# Altium PCB MCU099_MSPM0L1306_PCB.PcbDoc (part 5 of 5)
Units mil, origin at the board's own origin, x right, y up, seen from the top; angles counter-clockwise.
Board outline 2310.03 x 3906.03 mil, 4 copper layers (Top Layer, VCC Layer, GND Layer, Bottom Layer), stack 62.4 mil thick; 211 components, 124 nets, 674 pads, 192 vias.
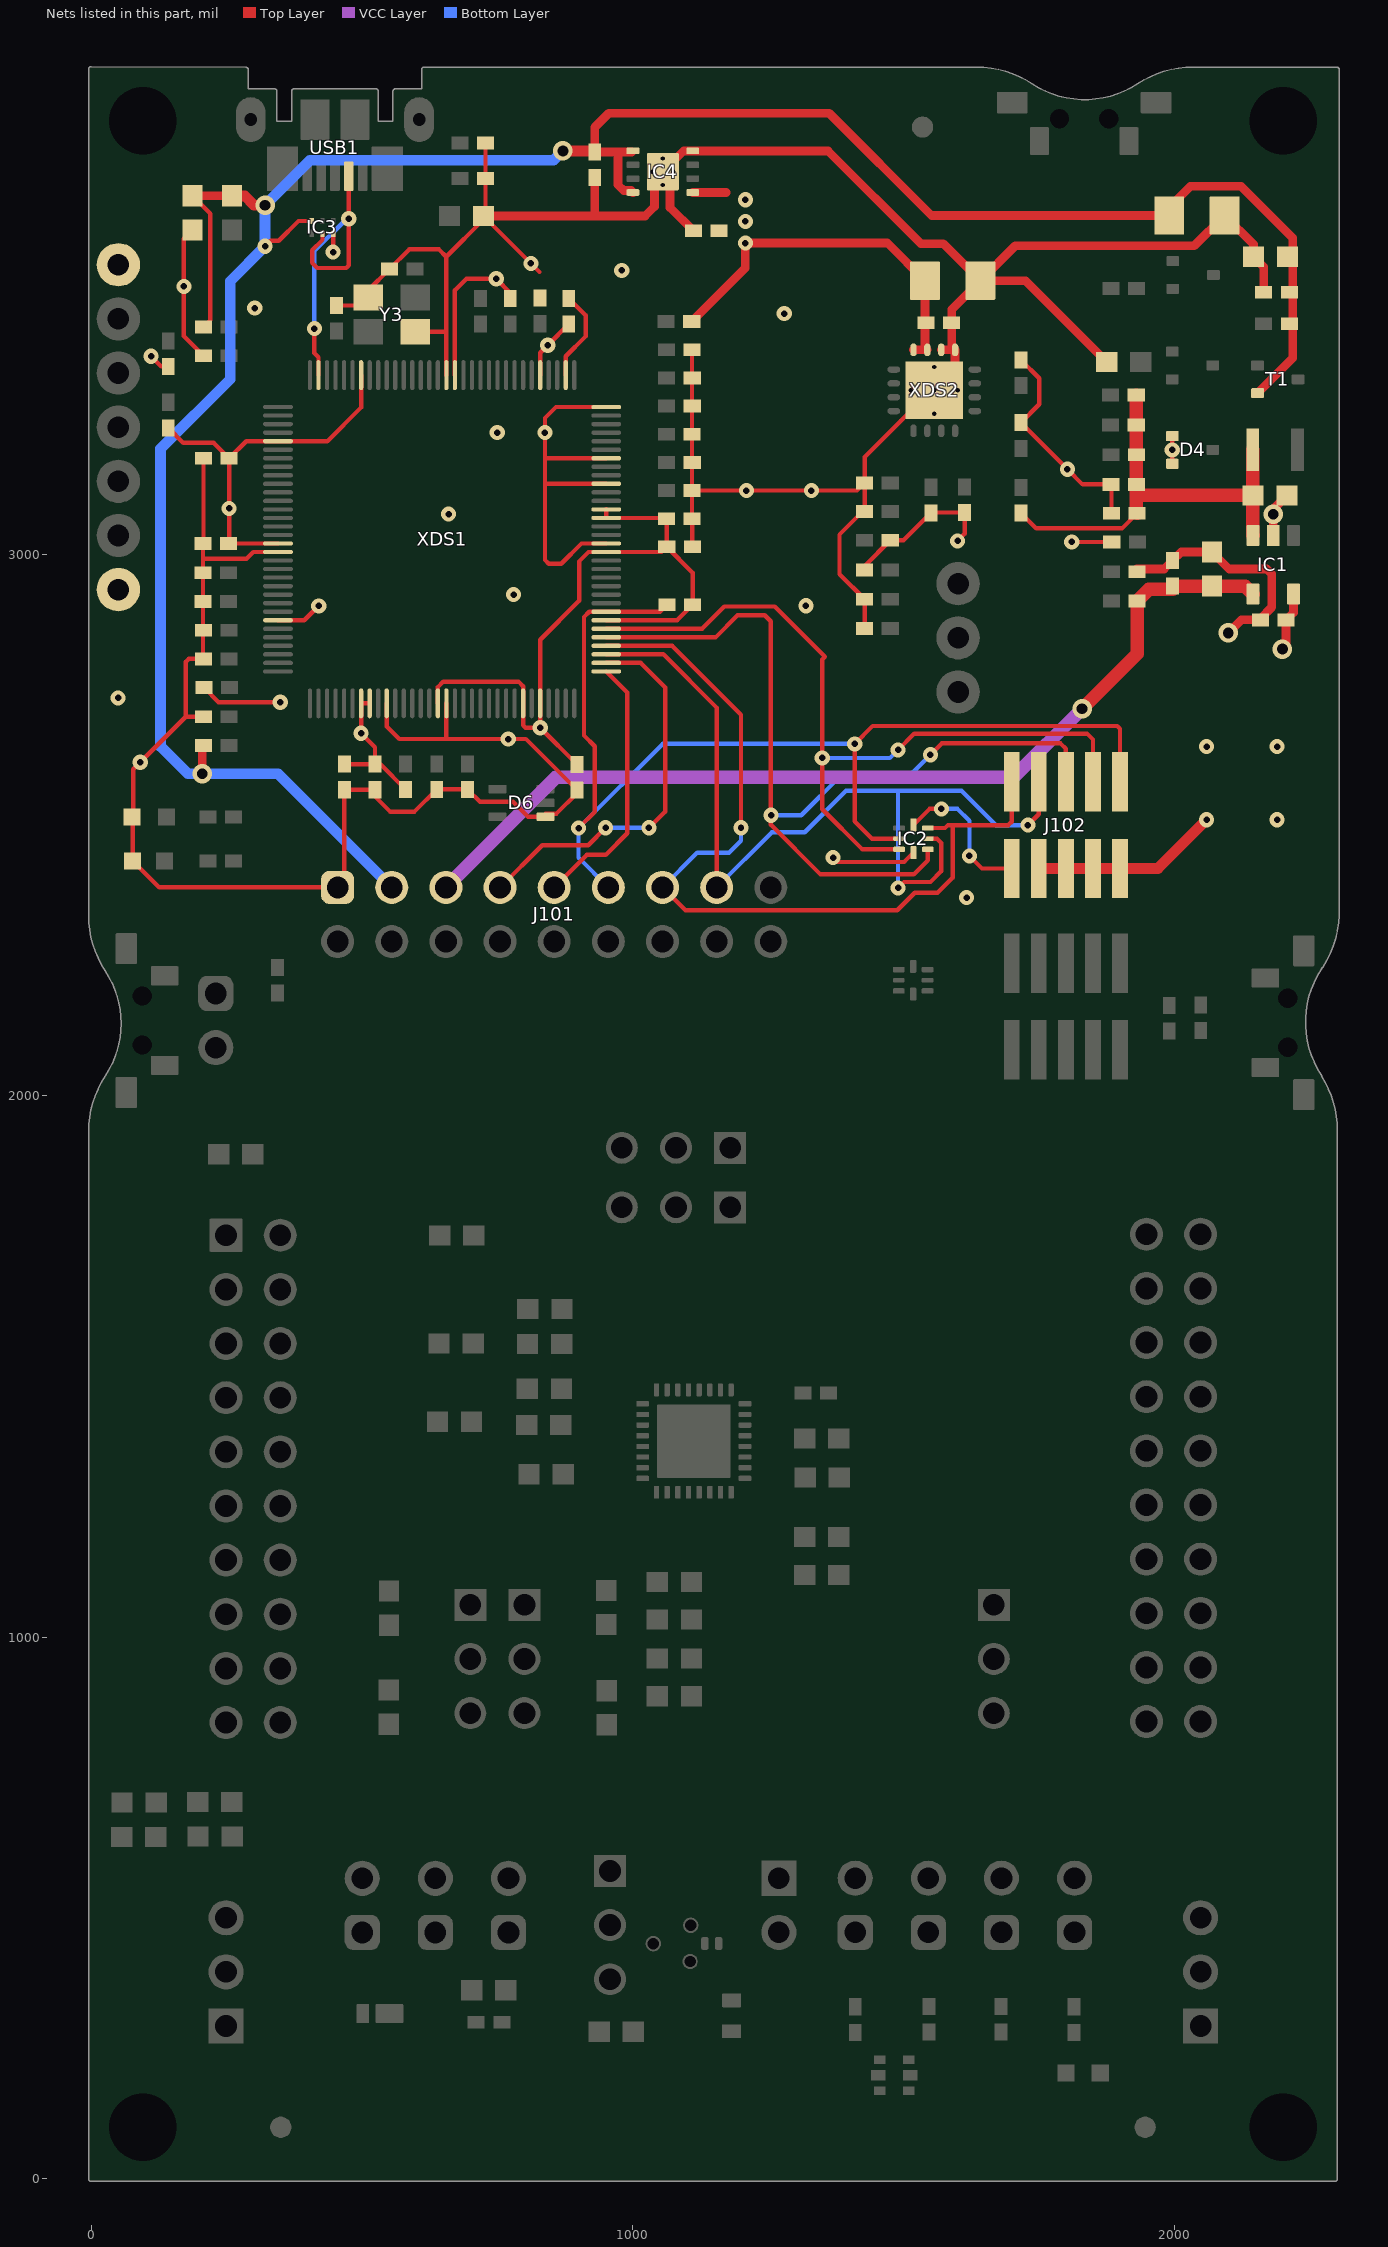
[diagram p5: the nets of this part, all layers, seen from the top]

## Via types
v1: diameter 28, hole 12, Top Layer to Bottom Layer, tented both sides, 89 vias
v2: diameter 28, hole 12, Top Layer to Bottom Layer, 77 vias
v3: diameter 19.68, hole 7.87, Top Layer to Bottom Layer, tented both sides, 12 vias
v4: diameter 36, hole 20, Top Layer to Bottom Layer, tented both sides, 7 vias
v5: diameter 19.68, hole 7.87, Top Layer to Bottom Layer, 5 vias
v6: diameter 40, hole 18, Top Layer to Bottom Layer, 1 vias
v7: diameter 28/28/28/28 (per signal layer), hole 12, Top Layer to Bottom Layer, tented top, 1 vias

## Nets (pads, with @x,y where several pads share a name; then routed paths per layer and width w, separated by ;. In a path a pad name is that pad's centre, name@x,y a point inside that pad or via, vN(x,y) a via of type N, cw(c..) or ccw(c..) an arc to the next point about the centre after c; other vN are vias at no path point) (continued)
XDS_GND: C13.2 C14.2 C15.2 C16.2 C17.2 C18.2 C19.2 C20.2 C21.2 C22.2 C23.2 C24.2 C25.2 C26.2 C27.2 C28.2 C29.2 C30.2 C31.2 C32.2 C33.2 C34.2 C35.2 C36.1 C37.2 C38.2 C39.2 C40.2 C41.2 C42.1 C43.2 C52.2 C53.2 C54.2 C55.2 C56.2 D4.1 D4.2 D6.1 IC1.2 IC2.4 IC3.3 IC4.4 IC4.9 J101.1 J102.3 J102.5 J102.7 J102.9 LED101.2 LED102.2 R24.2 R25.2 R26.2 R27.2 R33.1 R38.1 R45.1 R47.1 R50.1 R53.1 R54.1 R55.1 R85.2 R87.1 R89.1 TP10.1 XDS1.10 XDS1.17 XDS1.48 XDS1.55 XDS1.58 XDS1.64 XDS1.66 XDS1.80 XDS1.114 XDS2.13 XDS2.14 XDS2.17 Y3.2 Y3.4 | length 10059.2
  Top Layer w8: C52.2@187,3599.23 171,3583.23 v1(171,3495) 171,3403.38 C13.2@207.38,3367 ; R87.1@207.38,2700 174.5,2700 ; C18.2@207.38,3177.61 207.38,3021 C19.2@206.38,3020 206.38,2992 ; XDS1.114@344.85,3004.38 299.08,3004.38 286.7,2992 206.38,2992 ; v1(446.68,3558.31) IC3.3@446.68,3592.19 ; C29.2@452.72,3459.62 496.82,3459.62 Y3.4@511.69,3474.5 511.69,3487.9 C28.2@550.75,3526.97 587.18,3563.39 642.22,3563.39 655.75,3549.87 ; XDS1.10@545.64,2724.85 545.64,2682.16 568.8,2659 657,2659 ; Y3.2@598.31,3411.5 655.38,3411.5 655.75,3411.87 655.75,3549.87 ; XDS1.17@655.87,2724.85 655.87,2660.13 657,2659 ; XDS1.80@655.87,3331.15 655.87,3411.5 ; C53.2@728,3760 728,3628.5 R85.2@724.5,3625 ; 828,3521.5 v1(812,3537.5) R85.2@724.5,3625 ; XDS1.66@876.35,3331.15 876.35,3366.02 913,3402.68 913,3441.62 C14.2@882,3472.62 ; XDS1.48@951.15,3020.13 905.45,3020.13 868.12,2982.79 844.96,2982.79 838,2989.75 838,3131 ; XDS1.55@951.15,3130.36 838.64,3130.36 838,3131 ; XDS1.58@951.15,3177.61 838.61,3177.61 838,3177 ; XDS1.64@951.15,3272.22 858.22,3272.22 838,3252 v1(838,3225) 838,3177 ; C27.2@1109.62,3378 R26.2@1109.62,3222 R33.1@1109.62,3118 ; C15.2@1110.13,3014 1110.13,3065.5 C16.2@1109.62,3066 R33.1@1109.62,3118 ; v2(1370,2440) 1378,2432 1501.27,2432 IC2.4@1518.56,2449.29 ; R47.1@1428.38,2863 C34.2@1428.38,2917 1382,2963.38 1382,3036.5 1424.5,3079 R45.1@1428.38,3079 C33.2@1428.38,3132 ; v3(1557,3303) 1551.41,3303 1505.88,3257.47 1505.88,3257.25 1495.47,3246.83 1495.24,3246.83 1428.38,3179.97 C33.2@1428.38,3132 ; C30.2@1717,3359.24 1751,3325.24 1751,3277.24 R38.1@1717,3243.24 v1(1803,3157.24) 1830.89,3129.35 C41.2@1883.38,3129.35 1884.38,3128.35 C43.2@1884.38,3076 ; v1(1810.75,3023) R50.1@1884.76,3023 ; D4.2@1996.6,3167.41 v1(1996.6,3193) D4.1@1996.6,3218.59 ; 174.5,2700 v1(90.5,2616) 77.59,2603.09 77.59,2515.41 76.47,2514.29 LED102.2@76.47,2434 125.47,2385 J101.1@455,2385 467.5,2397.5 C17.2@467.5,2565.38 C20.2@524,2565.38 524,2553 552,2525 596.99,2525 C25.2@638,2566.01 C26.2@695,2566.01 718.01,2543 779,2543 806.59,2515.41 D6.1@838.79,2515.41 838.79,2521.25 859.29,2521.25 897,2558.96 C21.2@897,2564.76 802.76,2659 v1(770,2659) 657,2659 ; 174.5,2700 174.5,2801.5 180,2807 R55.1@207.38,2807 206.38,2808 C23.2@206.38,2913 C22.2@206.38,2966 206.38,2992 ; 655.75,3549.87 724.5,3618.62 R85.2@724.5,3625 ; 838,3131 838,3177 ; R33.1@1109.62,3118 v1(1210,3118) v1(1330,3118) 1414.38,3118 C33.2@1428.38,3132
  Top Layer w16: R85.2@724.5,3625 930,3625 ; C54.2@930,3695.95 930,3625 ; C55.2@1112.1,3597.58 1069,3640.68 1069,3693.39 IC4.9@1055.61,3706.78 ; v3(1557,3303) 1595.39,3341.39 XDS2.13@1595.39,3377.8 1586,3377.8 ; XDS2.14@1569.79,3377.8 1586,3377.8 ; R53.1@1875.5,3355.41 1725.34,3505.58 C31.2@1642.2,3505.58 ; R54.1@1931.24,2968 1931.24,2973 1981.38,2973 C38.2@1997,2988.62 2012.87,3004.5 C39.2@2070,3004.5 2101.5,2973 2171,2973 2180,2964 2180,2902.39 2159.38,2881.76 C40.2@2159.38,2879 2124,2879 v4(2100,2855) ; C37.2@2165.38,3484 2165.38,3530.99 C36.1@2146.5,3549.87 2146.5,3572.68 C35.2@2093.18,3626 2037.1,3569.92 1706.54,3569.92 C31.2@1642.2,3505.58 ; IC1.2@2183,3035 v4(2183,3074) 2183,3083.5 C42.1@2208.5,3109 ; 930,3625 1022.77,3625 1040.25,3642.49 1040.25,3691.43 IC4.9@1055.61,3706.78 ; IC4.9@1055.61,3706.78 1093.99,3745.17 IC4.4@1110.72,3745.17 1360.63,3745.17 1531.8,3574 1573.77,3574 C31.2@1642.2,3505.58 ; 1586,3377.8 1589,3380.8 C32.2@1589,3428 1589,3452.38 C31.2@1642.2,3505.58
  Top Layer w20: J102.3@1750,2419.88 J102.5@1800,2419.88 J102.7@1850,2419.88 J102.9@1900,2419.88 1969.88,2419.88 v2(2060,2510)
  other v1: 1616.48,2366.17 2060,2645 2190,2645 49.5,2735 1320,2905.04 660,3074.32 749.88,3224.85 1280,3444.87 301.94,3454.84 979.85,3524.59
  other v2: 2190,2510
  other v3: 1557,3259.69 1513.69,3303 1600.31,3303 1557,3346.31 1055.61,3682.17 1035.92,3706.78 1075.29,3706.78 1055.61,3731.39
  other v7: 780.01,2925.64
XDS_ID: IC3.2 USB1.4 XDS1.95 | length 620.4
  Top Layer w8: v1(412,3417.02) 412,3371.85 419.65,3364.2 XDS1.95@419.65,3331.15 ; IC3.2@427,3592.19 427,3580.9 408.04,3561.94 408.04,3538.4 417.44,3529 470.93,3529 475.68,3533.75 v1(475.68,3620) USB1.4@475.68,3698.28
  Bottom Layer w8: v1(412,3417.02) 412,3560.22 471.78,3620 v1(475.68,3620)
XDS_RESET_OUT: IC2.2 J101.11 J102.10 R84.1 XDS1.40 | length 2122
  Top Layer w8: v1(900,2494.5) 930,2524.5 930,2645.5 910,2665.5 910,2884.5 919.65,2894.14 XDS1.40@951.15,2894.14 1050.52,2894.14 R84.1@1063.38,2907 ; IC2.2@1491.99,2474.88 1442.09,2474.88 1410.09,2506.87 v1(1410.09,2650) 1443.09,2683 1895,2683 1900,2678 J102.10@1900,2580.12
  Bottom Layer w8: J101.11@955,2385 900,2440 v1(900,2494.5) 1055.5,2650 v1(1410.09,2650)
XDS_RXD: J101.9 XDS1.33 | length 491.4
  Top Layer w8: J101.9@855,2385 915,2445 950.09,2445 990,2484.91 990,2744.99 951.21,2783.78 XDS1.33@951.15,2783.78
XDS_TCK_SWDCLK: IC2.6 J101.15 J102.4 XDS1.35 | length 1692.1
  Top Layer w8: XDS1.35@951.15,2815.4 1056.6,2815.4 1155,2717 J101.15@1155,2385 ; v1(1490,2384) 1500.93,2394.93 1549.85,2394.93 1570,2415.08 1570,2467 1562.12,2474.88 IC2.6@1545.14,2474.88 ; v2(1730,2500) 1750,2520 J102.4@1750,2580.12
  Bottom Layer w8: J101.15@1155,2385 1257,2487 1317.62,2487 1394,2563.38 1607.13,2563.38 1670.5,2500 v2(1730,2500) ; v1(1490,2384) 1490,2563
XDS_TDI: IC2.3 J102.8 XDS1.38 | length 1516.7
  Top Layer w8: XDS1.38@951.15,2862.65 1128.16,2862.65 1169.2,2903.68 1262.15,2903.68 1355,2810.83 1350,2805.83 v1(1350,2624) 1350,2529.38 1424.18,2455.19 IC2.3@1491.99,2455.19 ; v2(1490,2639) 1520,2669 1839.09,2669 1850,2658.1 J102.8@1850,2580.12
  Bottom Layer w8: v1(1350,2624) 1475,2624 v2(1490,2639)
XDS_TDO_SWO: IC2.5 J102.6 XDS1.37 | length 1724.4
  Top Layer w8: XDS1.37@951.15,2846.9 1038.1,2846.9 ; 1038.1,2846.77 1152.8,2846.77 1193.68,2887.65 1243.88,2887.65 1255,2876.53 1255,2500.97 1346.97,2409 1519,2409 1545.14,2435.14 IC2.5@1545.14,2455.19 ; v2(1549.85,2630) 1570.85,2651 1790,2651 1800,2641 J102.6@1800,2580.12
  Bottom Layer w8: v1(1255.66,2518.24) 1311.34,2518.24 1383.09,2590 1509.85,2590 v2(1549.85,2630)
XDS_TMS_SWDIO: IC2.7 J101.13 J102.2 XDS1.36 | length 1624.1
  Top Layer w8: XDS1.36@951.15,2831.15 1072.85,2831.15 ; J101.13@1055,2385 1097.39,2342.61 1488.61,2342.61 1521,2375 1563,2375 1591,2403 1591,2500 ; 1072.85,2830.9 1073.1,2830.9 1200,2704 v1(1200,2495) ; IC2.7@1545.14,2494.56 1576.81,2494.56 1582.25,2500 1591,2500 ; J102.2@1700,2580.12 1700,2506.4 1693.59,2500 1591,2500
  Bottom Layer w8: J101.13@1055,2385 1119,2449 1177.96,2449 1200,2471.04 v1(1200,2495)
XDS_TXD: J101.7 XDS1.34 | length 719.8
  Top Layer w8: J101.7@755,2385 833,2463 918,2463 v1(950,2495) ; XDS1.34@951.15,2799.65 1014.6,2799.65 ; 1014.6,2799.53 1014.72,2799.53 1060,2754.25 1060,2525 v1(1030,2495)
  Bottom Layer w8: v1(950,2495) v1(1030,2495)
XDS_VBUS: C35.1 C36.2 C37.1 C52.1 C54.1 IC3.6 IC4.5 IC4.8 J101.3 R28.1 R49.2 R86.1 R88.2 T1.2 | length 4797.5
  Top Layer w8: C52.1@187,3662.22 220,3629.22 220,3432.62 R28.1@207.38,3420 ; v1(321,3569) 331.35,3579.35 346.23,3579.35 382.69,3615.81 IC3.6@407.31,3615.81
  Top Layer w16: C52.1@187,3662.22 R88.2@260,3662.22 ; v4(205,2595) 205,2644.62 R86.1@207.38,2647 ; C54.1@928.03,3745.17 C54.1@930,3743.2 ; IC4.5@998.52,3743.2 973,3743.2 ; IC4.8@1000.49,3668.39 996.87,3672.01 983.25,3672.01 972.8,3682.45 972.8,3731.31 973,3731.5 973,3743.2 ; T1.2@2154,3297.82 2219,3362.82 2219,3584.49 2123.49,3680 2030,3680 1990.82,3640.82 C35.1@1990.82,3626 1552,3626 1363,3815 955.9,3815 930,3789.1 C54.1@930,3743.2 ; C54.1@930,3743.2 973,3743.2
  Top Layer w20: R88.2@260,3662.22 283.48,3662.22 300.7,3645 v4(321,3645) ; v4(871,3745.17) C54.1@928.03,3745.17
  Bottom Layer w20: J101.3@555,2385 345,2595 v4(205,2595) 178.5,2595 128,2645.5 128,3195 256.62,3323.62 256.62,3504.62 v1(321,3569) v4(321,3645) 404,3728 853.83,3728 v4(871,3745.17)
XDS_VCC: C14.1 C15.1 C16.1 C17.1 C18.1 C19.1 C20.1 C21.1 C31.1 C32.1 C40.1 C55.1 IC1.5 IC2.8 IC4.1 J102.1 R31.2 R35.2 R36.2 R42.2 R43.2 R44.2 R46.2 R52.2 R84.2 R90.1 R91.1 TP4.1 XDS1.7 XDS1.8 XDS1.16 XDS1.26 XDS1.28 XDS1.39 XDS1.47 XDS1.51 XDS1.52 XDS1.69 XDS1.79 XDS1.90 XDS1.101 XDS1.113 XDS1.122 XDS2.15 XDS2.16 | length 4509.8
  Top Layer w8: v1(110.33,3366) 129.2,3347.13 R90.1@142,3347.13 ; R91.1@142,3233.76 169.76,3206 226.23,3206 C18.1@254.62,3177.61 ; R52.2@208,2754 235,2727 v1(349,2727) ; C19.1@253.62,3020 C19.1@253.75,3020.13 ; XDS1.122@344.85,2878.39 393.39,2878.39 v1(420,2905) ; XDS1.113@344.85,3020.13 C19.1@253.75,3020.13 ; C17.1@467.5,2612.62 C20.1@524,2612.62 ; XDS1.90@498.39,3331.15 498.39,3271.39 436.1,3209.1 XDS1.101@344.85,3209.1 286.12,3209.1 C18.1@254.62,3177.61 ; XDS1.8@514.14,2724.85 XDS1.7@498.39,2724.85 v1(498.39,2669.61) 524,2644 C20.1@524,2612.62 ; R35.2@580.39,2566.01 533.78,2612.62 C20.1@524,2612.62 ; XDS1.16@640.13,2724.85 640.13,2755.13 650,2765 789,2765 797.61,2756.39 XDS1.26@797.61,2724.85 797.61,2684.39 802.1,2679.9 v1(829.1,2679.9) ; XDS1.79@671.62,3331.15 671.62,3487.69 692.94,3509 v1(748,3509) 774,3483 R31.2@774,3472.62 ; XDS1.69@829.1,3331.15 829.1,3372.48 v1(843,3386.38) C14.1@882,3425.38 ; C21.1@897,2612 v1(829.1,2679.9) ; XDS1.39@951.15,2878.39 1082.02,2878.39 R84.2@1110.62,2907 1110.62,2966.26 C15.1@1062.88,3014 ; XDS1.52@951.15,3083.12 XDS1.51@951.15,3067.37 1061.01,3067.37 C16.1@1062.38,3066 1062.88,3065.5 C15.1@1062.88,3014 ; 1172.6,3668.39 1174,3667 ; R46.2@1428.38,2971 1428.38,2978.76 R44.2@1475.62,3026 1500.27,3026 R43.2@1551,3076.73 1551.65,3077.38 R42.2@1613,3077.38 1613,3038 v1(1600,3025) ; IC2.8@1518.56,2500.47 1548.09,2530 v2(1570,2530) ; v2(1622,2443) 1645.12,2419.88 J102.1@1700,2419.88 ; C19.1@253.75,3020.13 254.62,3021 v1(254.62,3085) C18.1@254.62,3177.61 ; v1(829.1,2679.9) XDS1.28@829.1,2724.85 829.1,2842.31 901,2914.21 901,2987 918.38,3004.38 XDS1.47@951.15,3004.38 1053.26,3004.38 C15.1@1062.88,3014
  Top Layer w16: R36.2@1109,3430 1208,3529 v1(1208,3575) 1470.41,3575 C31.1@1539.84,3505.58 1539.84,3382.17 XDS2.15@1544.2,3377.8 XDS2.16@1518.61,3377.8 ; IC4.1@1110.72,3668.39 1172.6,3668.39 ; v4(2200,2825) 2206.62,2831.62 C40.1@2206.62,2879 2220.4,2892.78 IC1.5@2220.4,2926.73
  Bottom Layer w8: v2(1570,2530) 1600,2530 1622,2508 v2(1622,2443)
  other v1: 1208,3615 1208,3655
XDS_VCCOUT: C41.1 C42.2 C43.1 IC1.3 L1.2 R37.2 R39.2 R40.2 R41.2 | length 830.6
  Top Layer w8: R37.2@1717,3076.38 1745.38,3048 1903.62,3048 C43.1@1931.62,3076
  Top Layer w25: R40.2@1930,3294.2 R41.2@1930,3239 1930,3108.85 ; C43.1@1931.62,3076 1930,3077.62 1930,3108.85 ; L1.2@2145.06,3193 2145.06,3109.44 C42.2@2145.5,3109 ; IC1.3@2145.6,3035 2145.5,3035.09 C42.2@2145.5,3109 ; 1930,3108.85 1930.15,3109 C42.2@2145.5,3109
XDS_VCCTARGET: C38.1 C39.1 IC1.4 J101.5 R51.2 | length 1787.4
  Top Layer w25: v4(1830,2715) 1931.62,2816.62 R51.2@1931.62,2914 1953.44,2935.81 1997,2935.81 C38.1@1997,2941.38 2130.95,2941.38 IC1.4@2145.6,2926.73
  VCC Layer w25: J101.5@655,2385 858,2588 1703,2588 v4(1830,2715)
pads on no net: D6.2 D6.4 D6.5 FID1.1 FID2.1 FID3.1 H1. H2. IC4.2 IC4.3 IC4.6 IC4.7 J1/J3.27 J1/J3.28 J1/J3.29 J1/J3.30 J2/J4.31 J2/J4.32 J2/J4.33 J2/J4.34 J103.6 J103.8 MH1.1 MH2.1 MH3.1 MH4.1 RT1.1S RT1.2S S1. S2. S3. SH-J1.0 SH-J2.0 SH-J3.0 SH-J4.0 SH-J5.0 SH-J6.0 SH-J7.0 SH-J8.0 SH-J9.0 SH-J10.0 SH-J11.0 SH-J12.0 SH-J13.0 SH-J14.0 SH-J15.0 SH-J16.0 SH-J17.0 SH-J18.0 SH-J19.0 SH-J20.0 SH-J21.0 SH-J22.0 SH-J23.0 SH-J24.0 U1.1 U1.3 XDS1.2 XDS1.12 XDS1.13 XDS1.14 XDS1.15 XDS1.18 XDS1.19 XDS1.20 XDS1.21 XDS1.22 XDS1.23 XDS1.24 XDS1.25 XDS1.29 XDS1.30 XDS1.31 XDS1.32 XDS1.41 XDS1.43 XDS1.44 XDS1.45 XDS1.46 XDS1.53 XDS1.54 XDS1.56 XDS1.57 XDS1.65 XDS1.67 XDS1.71 XDS1.72 XDS1.73 XDS1.74 XDS1.75 XDS1.76 XDS1.81 XDS1.82 XDS1.83 XDS1.84 XDS1.85 XDS1.86 XDS1.91 XDS1.92 XDS1.102 XDS1.103 XDS1.104 XDS1.105 XDS1.106 XDS1.107 XDS1.108 XDS1.109 XDS1.110 XDS1.111 XDS1.112 XDS1.116 XDS1.117 XDS1.118 XDS1.119 XDS1.121 XDS1.123 XDS1.124 XDS1.125 XDS1.126

## Polygon pours and split planes (outlines as drawn)
GND on Top Layer "TOP_LAYER_GND_P004" (solid, remove dead copper, pour order 4): -5.06,2333.62 2305.01,2333.62 2305.01,0 -5.02,0
XDS_GND on Top Layer "TOP_LAYER_XDS_GND_P034" (solid, remove dead copper, pour order 34): 0,3901 2300,3901 2300,2335 0,2335
XDS_VCC on Top Layer "TOP_LAYER_XDS_VCC_P010" (solid, pour order 10): 1140,3685 1230,3685 1230,3545 1140,3545
GND on GND Layer "GND_LAYER_GND_P-001" (solid, remove dead copper, pour order 44): 0.02,2335 2301.49,2335 2301.49,5.49 2301,5 0,5 0,2335
XDS_GND on GND Layer "GND_LAYER_XDS_GND_P008" (solid, remove dead copper, pour order 8): 0,3901 2301.49,3901 2301.49,2335 0,2335
3V3 on VCC Layer "VCC_LAYER_3V3_P032" (solid, remove dead copper, pour order 32): -0.01,-1.99 2305.01,-1.99 2305.01,2333.62 -6.68,2333.62
XDS_VCC on VCC Layer "GND_LAYER_GND_P-001" (solid, remove dead copper, pour order 38): 0.02,3895 2300,3895 2300,2335 0.02,2335
GND on Bottom Layer "BOTTOM_LAYER_GND_P036" (solid, remove dead copper, pour order 36): -4.87,2335 2304.92,2335 2304.92,0.03 -4.82,0.03
XDS_GND on Bottom Layer "BOTTOM_LAYER_XDS_GND_P014" (solid, remove dead copper, pour order 14): 0.02,3901 2300,3901 2300,2335 0.02,2335

## Keep-outs
Keep-Out Layer:
  text ".Layer_Name" at 527,-1823.49 h30

## Other copper
Top Layer:
  pour cut-out: 908.44,547.07 908.44,468.94 908,468.5 866.69,509.81 866.69,514.42
  pour cut-out: 1017.63,469.53 1023.63,469.53 1039.64,485.54 1000,485.54
  pour cut-out: 1196.02,470.75 1212.11,425.88 1187.38,450.61 1182.56,450.61
  pour cut-out: 1030.72,300.08 1049.88,305.81 1067.48,312.42 1018.23,354.61 1018.23,304.24
  pour cut-out: 1617,2193.03 1673.61,2193.03 1675,2194.43 1684.02,2185.41 1684.02,2176.73 1653.49,2146.21 1631.99,2146.21 1631.99,2161.9 1640.43,2170.35
  pour cut-out: 1617,2193.03 1606.7,2203.33 1606.7,2208.79 1579.88,2181.97 1581.86,2179.99 1598.21,2179.99
  pour cut-out: 1505.47,2232.5 1531.17,2232.5 1532.02,2231.66 1527.16,2226.8 1527.16,2207.49 1508.28,2207.49 1506.78,2209
  pour cut-out: 1727,2022 1932.24,2022 1932.24,2179 1727,2179
  pour cut-out: 600,258.5 600,355.5 464,355.5 464,258.5
  pour cut-out: 1727,2362 1932.24,2362 1932.24,2513.79 1727,2513.79
Bottom Layer:
  pour cut-out: 523.44,585.83 554.61,617 456.4,617 476.16,597.23 476.16,585.83
  pour cut-out: 472.79,2965.85 527.54,3020.61 527.54,3011.71 537.91,3001.34 537.91,2990.01 537,2989.09 538.09,2988 538.09,2791.41 593.94,2735.56 595.96,2735.56 595.96,2719.22 593.33,2716.59 572.67,2716.59 509.59,2779.66 509.59,2917.1 474,2952.69 474,2965.43
  pour cut-out: 590.54,2737.38 590.54,2717.04 590.5,2717 590.71,2716.79 1532.45,2716.79 1532.45,2732.04 1527.49,2737

## Silkscreen, mask and mechanical layers (free items; w line width, h text height)
Top Overlay:
  drawing of 1914 lines, arcs and shapes, not listed
  text "MSP NRST" at 1610.96,3626 h40
  text "Rev. A" at 2141.6,2536.03 h30 r90
  text "XDS110-ET Debug Probe" at 428.03,2453 h30
  text "Rev1.4" at 1158,2447 h30
  text "LP-MSPM0L1306" at 2092.88,2367 h70 r89.71
  text "XDS110 Out" at 1650.09,2363 h30 r90
  text "BSL" at 1276,2090.5 h40 r90
  text "NRST" at 978.94,2049 h40 r90
  text "RXD<<" at 775,2040 h40 r90
  text "TXD>>" at 875,2040 h40 r90
  text "XDS110 In" at 1650.09,2037 h30 r90
  text "SWDIO" at 1075,2030 h40 r90
  text "SWCLK" at 1175,2030 h40 r90
  text "(PA18)" at 261.62,1974.48 h40
  text "(PA14)" at 1930.62,1962.28 h40
  text "PA12" at 1757.88,1729.3 h60
  text "BP" at 951,1695 h60
  text "XDS" at 1150.64,1695 h60
  text "PA25" at 40.42,1629.89 h60
  text "PA13" at 1757.88,1629.89 h60
  text "PA3" at 2126.26,1629.89 h60
  text "PA9" at 40.42,1529.82 h60
  text "PA15" at 435.76,1529.82 h60
  text "PA26" at 1757.88,1529.82 h60
  text "PA7" at 2126.26,1529.23 h60
  text "MSPM0L1306" at 1030.73,1518.93 h70 r359.26
  text "PA8" at 40.42,1429.74 h60
  text "PA16" at 435.76,1429.74 h60
  text "PA19" at 2126.26,1429.91 h60
  text "PA27" at 1757.88,1429.08 h60
  text "PA10" at 1757.88,1329.67 h60
  text "NRST" at 2126.26,1329.92 h60
  text "PA24" at 40.42,1329 h60
  text "PA17" at 435.76,1329 h60
  text "PA18" at 435.76,1229.59 h60
  text "PA5" at 2126.26,1229.93 h60
  text "PA21" at 40.42,1228.93 h60
  text "SW2" at 1757.88,1228.93 h60
  text "PA0/PA1" at 659.5,1214.43 h30
  text "Pullups" at 658,1170.09 h30
  text "PA6" at 40.42,1129.52 h60
  text "NC" at 435.76,1129.52 h60
  text "NC" at 1757.88,1129.52 h60
  text "PA4" at 2126.26,1129.27 h60
  text "SW1" at 1484.48,1041 h60
  text "5V" at 862,1039 h30
  text "5V" at 588,1037 h30
  text "PA20" at 2126.26,1029.95 h60
  text "PA22" at 40.42,1028.78 h60
  text "NC" at 435.76,1029.45 h60
  text "NC" at 1757.88,1029.45 h60
  text "PA11" at 1484.48,940.33 h60
  text "PA23" at 2126.26,929.95 h60
  text "PA1" at 40.42,928.71 h60
  text "NC" at 435.76,929.37 h60
  text "NC" at 1757.88,929.37 h60
  text "3V" at 864,844 h30
  text "3V" at 588,843.35 h30
  text "SW2" at 1484.48,841 h60
  text "PA0" at 40.42,829.3 h60
  text "NC" at 435.76,829.3 h60
  text "NC" at 1757.88,829.3 h60
  text "SW1" at 2126.26,829.3 h60
  text "PA25" at 497.78,691.45 h50 r45
  text "PA24" at 636.3,690.84 h50 r45
  text "PA22" at 771.71,690.84 h50 r45
  text "T.PATH" at 960.95,687.78 h50 r48.53
  text "PA13" at 1411,685.43 h50 r45
  text "PA26" at 1546,685.43 h50 r45
  text "PA27" at 1676.33,685.43 h50 r45
  text "PA0" at 1818.95,683.22 h50 r45
  text "T.PWR" at 1269.78,679 h50 r48.53
  text "PA15" at 1019.26,572.22 h60
  text "PA25" at 1027.39,322.5 h60
  text "Thermistor" at 964.48,182.28 h30
  text ".Layer_Name" at 527,-1823.49 h30
Bottom Overlay:
  drawing of 10808 lines, arcs and shapes, not listed
  text "PA12" at 1882.4,1729.3 h60
  text "PA25" at 164.21,1629.89 h60
  text "PA13" at 1882.4,1629.89 h60
  text "PA3" at 2250,1629.89 h60
  text "PA9" at 164.21,1529.82 h60
  text "PA15" at 561.09,1529.82 h60
  text "PA26" at 1882.4,1529.82 h60
  text "PA7" at 2250,1529.23 h60
  text "PA8" at 164.21,1429.74 h60
  text "PA16" at 561.09,1429.74 h60
  text "PA19" at 2250,1429.91 h60
  text "PA27" at 1882.4,1429.08 h60
  text "PA10" at 1882.4,1329.67 h60
  text "NRST" at 2250,1329.92 h60
  text "PA24" at 164.21,1329 h60
  text "PA17" at 561.09,1329 h60
  text "PA18" at 561.09,1229.59 h60
  text "PA5" at 2250,1229.93 h60
  text "PA21" at 164.21,1228.93 h60
  text "SW2" at 1882.4,1228.93 h60
  text "PA6" at 164.21,1129.52 h60
  text "NC" at 561.09,1129.52 h60
  text "NC" at 1882.4,1129.52 h60
  text "PA4" at 2250,1129.27 h60
  text "PA20" at 2250,1029.95 h60
  text "PA22" at 164.21,1028.78 h60
  text "NC" at 561.09,1029.45 h60
  text "NC" at 1882.4,1029.45 h60
  text "PA23" at 2250,929.95 h60
  text "PA1" at 164.21,928.71 h60
  text "NC" at 561.09,929.37 h60
  text "NC" at 1882.4,929.37 h60
  text "PA0" at 164.21,829.3 h60
  text "NC" at 561.09,829.3 h60
  text "NC" at 1882.4,829.3 h60
  text "SW1" at 2250,829.3 h60
  text ".Layer_Name" at 527,-1823.49 h30
Top Paste:
  text ".Layer_Name" at 527,-1823.49 h30
Bottom Paste:
  text ".Layer_Name" at 527,-1823.49 h30
Top Solder:
  text ".Layer_Name" at 527,-1823.49 h30
  text ".Layer_Name" at 527,-1823.49 h30
Bottom Solder:
  text ".Layer_Name" at 527,-1823.49 h30
Drill Guide:
  text ".Layer_Name" at 527,-1823.49 h30
M1 Board Outline:
  lines w10: 0,2333.62 ccw(c181.67,2333.62) 30,2233.62 cw(c-121.67,2133.62) 30,2033.62 ccw(c181.67,1933.62) 0,1933.62 0,0 2296.48,0 2296.48,1936.12 ccw(c2114.81,1936.12) 2266.48,2036.12 ; 0,2336 0,3896 285,3895 ; 2267.48,2036.12 cw(c2419.15,2136.12) 2267.48,2236.12 ; 2270,2240.04 ccw(c2118.33,2340.04) 2300,2340.04 2300,3895 2035,3895 ccw(c2035,3713.33) 1935,3865 ; 285,3855 338,3855 ; 285,3855 285,3895 ; 285,3855 285,3895 ; 285,3855 338,3855 ; 338,3795 375,3795 ; 338,3795 338,3855 ; 338,3795 338,3855 ; 338,3795 375,3795 ; 375,3795 375,3855 ; 375,3795 375,3855 ; 375,3855 525,3855 ; 375,3855 525,3855 ; 525,3795 562,3795 ; 525,3795 525,3855 ; 525,3795 525,3855 ; 525,3795 562,3795 ; 562,3795 562,3855 ; 562,3795 562,3855 ; 562,3855 615,3855 ; 562,3855 615,3855 ; 615,3855 615,3895 ; 615,3855 615,3895 ; 615,3895 1635,3895 cw(c1635,3713.33) 1735,3865 ccw(c1835,4016.67) 1935,3865 ; 1935,3865 1935,3865
  text ".Layer_Name" at 527,-1823.49 h30
M2 Board Dimensions:
  rectangle: 75,-1365 450,-1240
  rectangle: -50,-1240 75,-1115
  lines w7: -50,-1240 950,-1240 ; 75,-1365 75,-1115 ; 200,-1365 200,-1115 ; 450,-1365 450,-1115 ; 700,-1365 700,-1115 ; -50,-1365 -50,-1115 950,-1115 950,-1365 -50,-1365
  lines w10: 1711,3898.98 1711,3956.98 1917,4162.98 1987.5,4162.98 ; 1835,3860.98 1835,3978.98 1919,4062.98 1995,4062.98 ; 1955,3898.98 1955,3952.98 1980,3977.98 1995,3977.98 ; 1980,4162.98 1995,4162.98 ; 2350,3897.98 2375,3922.98 2375,4212.98 2350,4237.98
  text "Radius 180" at 2015,4137.98 h30
  text "Radius 180" at 2015,4042.98 h30
  text "3 Places" at 2450,4040 h30
  text "Radius 180" at 2015,3952.98 h30
  text ".Layer_Name" at 527,-1823.49 h30
M3 3D STEP Top:
  text ".Layer_Name" at 527,-1823.49 h30
M4 3D STEP Bottom:
  text ".Layer_Name" at 527,-1823.49 h30
M5 Assembly Top:
  circle w6: c1240.07,1292.07 r5.83
  lines w10: -342,-1895.17 6258,-1895.17 ; -342,-1691.83 6260,-1691.83 ; -342,-1488.5 -342,-2098.5 3663,-2098.5 6260,-2098.5 6260,-1488.5 -341.5,-1488.5 -341.5,-2098.5 1234,-2098.5 ; 2123,-2098.5 2123,-1488.5 ; 3390,-1691.83 3390,-1488.5 ; 4230,-1691.83 4230,-1488.5 ; 4852,-2105 4852,-1902.17
  text "COMPONENTS MARKED 'DNP' SHOULD NOT BE POPULATED." at 1103.5,-1283.5 h30
  text "ASSEMBLY VARIANT:" at 1103,-1399 h30
  text ".VariantName" at 2139,-1399 h30
  text "PCB VIEWED FROM TOP SIDE" at -278.5,-1620.67 h30
  text "BOARD #:" at 2198,-1620.67 h30
  text ".PRJ_Number" at 2743.5,-1620.67 h30
  text "REV:" at 3588,-1620.67 h30
  text ".PCB_Rev" at 3879.5,-1620.67 h30
  text "SVN REV:" at 4426,-1620.67 h30
  text ".VersionControl_RevNumber" at 4932,-1620.67 h30
  text "TID #:" at 2198,-1824 h30
  text ".TID" at 2743.5,-1824 h30
  text "PLOT NAME =" at -278.5,-2029.34 h30
  text ".plot_File_Name" at 527,-2029.34 h30
  text "GENERATED    :" at 2200,-2029.34 h30
  text ".Print_Date" at 3069.5,-2029.34 h30
  text ".Print_Time" at 3798.5,-2029.34 h30
  text "TEXAS INSTRUMENTS" at 5063,-2029.34 h30
M6 Assembly Bottom:
  lines w10: -342.5,-1692.33 6259.5,-1692.33 ; -340.5,-1895.67 6259.5,-1895.67 ; 1065.5,-2105.5 1065.5,-1902.67 ; 1687.5,-1692.33 1687.5,-1489 ; 2527.5,-1692.33 2527.5,-1489 ; 3794.5,-2099 3794.5,-1489 ; 4683.5,-2099 6259,-2099 6259,-1489 -342.5,-1489 -342.5,-2099 2254.5,-2099 6259.5,-2099 6259.5,-1489
  text "COMPONENTS MARKED 'DNP' SHOULD NOT BE POPULATED." at 6052,-1283 h30
  text ".VariantName" at 5008,-1399 h30
  text "ASSEMBLY VARIANT:" at 6047,-1399 h30
  text ".VersionControl_RevNumber" at 985.5,-1621.17 h30
  text "SVN REV:" at 1491.5,-1621.17 h30
  text ".PCB_Rev" at 2038,-1621.17 h30
  text "REV:" at 2329.5,-1621.17 h30
  text ".PRJ_Number" at 3174,-1621.17 h30
  text "BOARD #:" at 3719.5,-1621.17 h30
  text "PCB VIEWED FROM BOTTOM SIDE" at 6196,-1621.17 h30
  text ".TID" at 3174,-1824.5 h30
  text "TID #:" at 3719.5,-1824.5 h30
  text "TEXAS INSTRUMENTS" at 854.5,-2029.84 h30
  text ".Print_Time" at 2119,-2029.84 h30
  text ".Print_Date" at 2848,-2029.84 h30
  text "GENERATED    :" at 3717.5,-2029.84 h30
  text ".plot_File_Name" at 5390.5,-2029.84 h30
  text "PLOT NAME =" at 6196,-2029.84 h30
M9 Title Sheet:
  drawing of 57 lines, arcs and shapes, not listed
  text "1" at 689.84,7071.5 h30
  text "2" at 3185.5,7071.5 h30
  text "3" at 5674.84,7071.5 h30
  text "4" at 8181.51,7071.5 h30
  text "5" at 10680.5,7071.5 h30
  text "6" at 13185.5,7071.5 h30
  text "A" at -466.5,5928.5 h30
  text "A" at 14333.5,5928.5 h30
  text "B" at -466.5,3548.5 h30
  text "B" at 14333.5,3548.5 h30
  text "C" at -466.5,1173.5 h30
  text "C" at 14333.5,1173.5 h30
  text "PROJECT TITLE:" at 11293.5,-687.5 h30
  text ".PRJ_Title" at 11343.5,-820.83 h30
  text "DESIGNED FOR:" at 11293.5,-988.5 h30
  text ".PRJ_Customer" at 11343.5,-1128.5 h30
  text "D" at -466.5,-1196.5 h30
  text "D" at 14333.5,-1196.5 h30
  text "FILE NAME:" at 11293.5,-1288.5 h30
  text ".PCB_File_Name_No_Path" at 11343.5,-1408.5 h30
  text "Texas Instruments (TI) and/or its licensors do not warrant the accuracy or completeness of this specification" at 6324,-1570.34 h30
  text "ENGINEER:" at 11293.5,-1578.5 h30
  text "LAYOUT BY:" at 12798.5,-1578.5 h30
  text "or any information contained therein. TI and/or its licensors do not warrant that this design will meet" at 6279.01,-1683 h30
  text ".PRJ_Engineer" at 11343.5,-1733.49 h30
  text ".PCB_Layout" at 12849,-1733.49 h30
  text "the specifications, will be suitable for your application or fit for any particular purpose, or will operate in" at 6279.01,-1795.67 h30
  text ".Layer_Name" at 527,-1823.49 h30
  text "ALTIUM DESIGNER VERSION:" at 12798.5,-1888.5 h30
  text "an implementation. TI and/or its licensors do not warrant that the design is production worthy. You should" at 6279.01,-1908.33 h30
  text "completely validate and test your design implementation to confirm the system functionality for your application." at 6324,-2021 h30
  text ".print_Scale" at 11343.5,-2021.83 h30
  text ".Application_BuildNumber" at 12849,-2021.83 h30
  text "1" at 689.84,-2228.5 h30
  text "2" at 3185.5,-2228.5 h30
  text "3" at 5674.84,-2228.5 h30
  text "4" at 8181.51,-2228.5 h30
  text "5" at 10680.5,-2228.5 h30
  text "6" at 13185.5,-2228.5 h30
M10 Fab Notes:
  drawing of 173 lines, arcs and shapes, not listed
  text "DESIGN INFORMATION" at 12328.02,5236 h30
  text "MIN. TRACK WIDTH:" at 11683.46,5056 h30
  text "8" at 12779.7,5056 h30
  text "MIL" at 12934.46,5056 h30
  text "MIN. CLEARANCE:" at 11683.46,4924 h30
  text "0.2" at 12719.7,4924 h30
  text "mm" at 12934.46,4924 h30
  text "MIN. VIA PAD SIZE:" at 11683.46,4792 h30
  text "24" at 12749.71,4792 h30
  text "MIL" at 12934.46,4792 h30
  text "0.05mm (2MIL)" at 12378.46,4650.29 h30
  text "MINIMUM ANNULAR RING" at 11354.23,4646 h30
  text "EXTERNAL" at 13086.46,4646 h30
  text "PER" at 11554.23,4528 h30
  text "IPC-D-275 CLASS 2 LEVEL C" at 11774.23,4528 h30
  text "MIL, HOLES" at 13262.46,4415.71 h30
  text "+/-" at 12870,4415 h30
  text "+/-" at 13724,4415 h30
  text "REGISTRATION TOLERANCES:" at 11354.23,4410 h30
  text "METAL" at 12554,4410 h30
  text "5" at 13130.2,4410 h30
  text "3" at 13963.2,4410 h30
  text "MIL" at 14079.46,4410 h30
  text "+/-" at 13724,4297 h30
  text "HOLE SIZE TOLERANCE (UNLESS OTHERWISE SPECIFIED):" at 11354.23,4292 h30
  text "3" at 13963.2,4292 h30
  text "MIL" at 14079.46,4292 h30
  text "MATERIAL:" at 11279.46,4082.54 h30
  text "FR-4 High Tg" at 12265.9,3942.21 h30
  text "FR-408" at 11700.46,3933.64 h30
  text "OTHER" at 13188.46,3933.64 h30
  text "X" at 12111,3930 h30
  text "62 MIL (1.6mm) +/-10%" at 12020.56,3770.92 h30
  text "THICKNESS:" at 11354.23,3766.64 h30
  text "X" at 11892.4,3766.64 h30
  text "OTHER" at 13305.46,3766.64 h30
  text "TOLERANCE:" at 11354.23,3608.64 h30
  text "X" at 12193.53,3608.64 h30
  text "ANSI IPC-6012 TYPE 3 CLASS 2" at 12380.48,3608.64 h30
  text "OTHER +/-" at 12380.46,3452.64 h30
  text "BOW & TWIST:" at 11354.23,3295.64 h30
  text "X" at 12193.53,3295.64 h30
  text "ANSI IPC-6012 TYPE 3 CLASS 2" at 12380.48,3295.64 h30
  text "OTHER +/-" at 12380.46,3137.13 h30
  text "DRILLING:" at 11279.46,2998.64 h30
  text "REFERENCE:" at 11354.23,2881.64 h30
  text "X" at 12002.46,2881.64 h30
  text "AS SHOWN" at 12189.46,2881.64 h30
  text "X" at 12903.46,2881.64 h30
  text "NC_DRILL FILES" at 13040.46,2881.64 h30
  text "PTH COPPER THICKNESS:" at 11354.23,2723.64 h30
  text "X" at 12484.46,2723.64 h30
  text "20-30 um" at 12621.46,2723.64 h30
  text "OTHER" at 13338.46,2723.64 h30
  text "BOARD FINISH:" at 11279.46,2564.64 h30
  text "SILKSCREEN:" at 11434.68,2446.64 h30
  text "X" at 12383.46,2446.64 h30
  text "TOP" at 12509.46,2446.64 h30
  text "X" at 12893.46,2446.64 h30
  text "BOTTOM" at 13020.46,2446.64 h30
  text "SILKSCREEN COLOR:" at 11434.68,2279.64 h30
  text "X" at 12382.42,2279.64 h30
  text "WHITE" at 12509.46,2279.64 h30
  text "OTHER" at 13020.46,2279.64 h30
  text "GREEN" at 12640.46,2120.44 h30
  text "X" at 13105,2120 h30
  text "OTHER" at 13258.46,2120.44 h30
  text "RED" at 13655,2120 h30
  text "SOLDER RESIST COLOR:" at 11434.68,2109.64 h30
  text "X" at 12513.42,1950.44 h30
  text "MATTE" at 12640.46,1950.44 h30
  text "SEMI-GLOSS" at 13258,1949.8 h30
  text "IMMERSION GOLD (ENIG)" at 12340.46,1761.92 h30
  text "ENEPIG" at 13678,1758.64 h30
  text "SURFACE FINISH:" at 11279.46,1757.64 h30
  text "IMM. TIN/SILVER OR EQUIV" at 11609,1600.64 h30
  text "OTHER" at 13040.46,1600.64 h30
  text "X" at 11445,1600 h30
  text "ARRAY/PANEL:" at 11279.46,1421.64 h30
  text "CUT AND TRIM PER M1 BOARD OUTLINE" at 12340.46,1417.35 h30
  text "N.C. ROUTE" at 12340.46,1265.64 h30
  text "X" at 13019.46,1265.64 h30
  text "V. SCORE" at 13206.46,1265.64 h30
  text "CERTIFICATION:" at 11279.46,1128.64 h30
  text "MATERIALS AND WORKMANSHIP FOR ALL PCBS" at 12004.46,1128.64 h30
  text "TO MEET OR EXCEED THE REQUIREMENTS OF:" at 12004.46,1030.64 h30
  text "X" at 11630.96,894.13 h30
  text "ANSI IPC-A-600F CLASS ->" at 11769.96,894.13 h30
  text "X" at 13409.02,894.13 h30
  text "2" at 13527.96,894.14 h30
  text "1" at 13212.96,892.64 h30
  text "3" at 13881.96,892.64 h30
  text "X" at 12445.02,734.64 h30
  text "RoHS" at 12581.96,734.64 h30
  text "OTHER" at 13226.36,734.64 h30
  text "PER ORDER" at 13623.42,734.64 h30
  text "ALL BOARDS MUST MEET OR EXCEED UL94-V0 REQUIREMENTS." at 11307,569 h30
  text "PCB MUST BEAR THE UL94V-0 UL REGISTERED MATERIAL ID NUMBER" at 11307,449 h30
  text "ADDITIONAL REQUIREMENTS:" at 11279.46,275.64 h30
  text "MICROSECTION:" at 11354.23,160.64 h30
  text "YES" at 12259.96,160.64 h30
  text "X" at 13585,5 h30
  text "REQUIRED" at 13121.46,4.49 h30
  text "BARE BOARD ELEC. TEST:" at 11354.23,1.64 h30
  text "NONE" at 12659.96,1.64 h30
  text "PER ORDER" at 13713.46,1.64 h30
  text ".Layer_Name" at 527,-1823.49 h30
M11 Gerber Information:
  lines w10: -342,-1895.17 6258,-1895.17 ; -342,-1691.83 6260,-1691.83 ; -342,-1488.5 -342,-2098.5 3663,-2098.5 6260,-2098.5 6260,-1488.5 -341.5,-1488.5 -341.5,-2098.5 1234,-2098.5 ; 2123,-2098.5 2123,-1488.5 ; 3390,-1691.83 3390,-1488.5 ; 4230,-1691.83 4230,-1488.5 ; 4852,-2105 4852,-1902.17
  text "ALL ARTWORK VIEWED FROM TOP SIDE" at -278.5,-1620.67 h30
  text "BOARD #:" at 2198,-1620.67 h30
  text ".PRJ_Number" at 2743.5,-1620.67 h30
  text "REV:" at 3588,-1620.67 h30
  text ".PCB_Rev" at 3879.5,-1620.67 h30
  text "SVN REV:" at 4426,-1620.67 h30
  text ".VersionControl_RevNumber" at 4932,-1620.67 h30
  text "LAYER NAME =" at -278.5,-1823.49 h30
  text "TID #:" at 2198,-1824 h30
  text ".TID" at 2743.5,-1824 h30
  text "PLOT NAME =" at -278.5,-2029.34 h30
  text ".plot_File_Name" at 527,-2029.34 h30
  text "GENERATED    :" at 2200,-2029.34 h30
  text ".Print_Date" at 3069.5,-2029.34 h30
  text ".Print_Time" at 3798.5,-2029.34 h30
  text "TEXAS INSTRUMENTS" at 5063,-2029.34 h30
M12 Stackup:
  drawing of 295 lines, arcs and shapes, not listed
  text "Layer" at 6075.44,5159.84 h30
  text "Name" at 6290.4,5159.84 h30
  text "Material" at 6765.27,5159.84 h30
  text "Thickness" at 7205.15,5159.84 h30
  text "Constant" at 7540.07,5159.84 h30
  text "Board Layer Stack" at 7835,5159.84 h30
  text "Top Overlay" at 6290.4,5099.84 h30
  text "Top Solder" at 6290.4,5039.84 h30
  text "Solder Resist" at 6765.27,5039.84 h30
  text "0.40mil" at 7205.15,5039.84 h30
  text "3.5" at 7540.07,5039.84 h30
  text "1" at 6075.44,4979.84 h30
  text "Top Layer" at 6290.4,4979.84 h30
  text "1.40mil" at 7205.15,4979.84 h30
  text "Dielectric 2" at 6290.4,4919.84 h30
  text "FR-4" at 6765.27,4919.84 h30
  text "8.40mil" at 7205.15,4919.84 h30
  text "4.2" at 7540.07,4919.84 h30
  text "2" at 6075.44,4859.84 h30
  text "VCC Layer" at 6290.4,4859.84 h30
  text "1.40mil" at 7205.15,4859.84 h30
  text "Dielectric1" at 6290.4,4799.84 h30
  text "FR-4" at 6765.27,4799.84 h30
  text "40.00mil" at 7205.15,4799.84 h30
  text "4.2" at 7540.07,4799.84 h30
  text "3" at 6075.44,4739.84 h30
  text "GND Layer" at 6290.4,4739.84 h30
  text "1.40mil" at 7205.15,4739.84 h30
  text "Dielectric 3" at 6290.4,4679.84 h30
  text "FR-4" at 6765.27,4679.84 h30
  text "8.40mil" at 7205.15,4679.84 h30
  text "4.2" at 7540.07,4679.84 h30
  text "4" at 6075.44,4619.84 h30
  text "Bottom Layer" at 6290.4,4619.84 h30
  text "1.40mil" at 7205.15,4619.84 h30
  text "Bottom Solder" at 6290.4,4559.84 h30
  text "Solder Resist" at 6765.27,4559.84 h30
  text "0.40mil" at 7205.15,4559.84 h30
  text "3.5" at 7540.07,4559.84 h30
  text "Bottom Overlay" at 6290.4,4499.84 h30
  text ".Layer_Name" at 527,-1823.49 h30
M13 Component Bodies Top:
  text ".Layer_Name" at 527,-1823.49 h30
M14 Component Bodies Bottom:
  text ".Layer_Name" at 527,-1823.49 h30
M15 Courtyards Top:
  text ".Layer_Name" at 527,-1823.49 h30
M16 Courtyards Bottom:
  text ".Layer_Name" at 527,-1823.49 h30
Drill Drawing:
  circle w10: c6074.12,3818.33 r10
  circle w10: c6074.12,3818.33 r16.67
  circle w10: c6074.12,3143.33 r16.67
  lines w10: 6057.46,3201.66 6057.46,3209.99 6065.79,3218.33 6057.46,3226.66 6057.46,3234.99 6065.79,3234.99 6074.12,3226.66 6082.46,3234.99 6090.79,3234.99 6090.79,3226.66 6082.46,3218.33 6090.79,3209.99 6090.79,3201.66 6082.46,3201.66 6074.12,3209.99 6065.79,3201.66 6057.46,3201.66 ; 6057.46,3276.66 6090.79,3276.66 6090.79,3309.99 6057.46,3309.99 6057.46,3276.66 ; 6057.46,3351.66 6074.12,3359.99 6090.79,3351.66 6082.46,3368.33 6090.79,3384.99 6074.12,3376.66 6057.46,3384.99 6065.79,3368.33 6057.46,3351.66 ; 6057.46,3459.99 6090.79,3459.99 6074.12,3426.66 6057.46,3459.99 ; 6057.46,3534.99 6090.79,3534.99 6074.12,3501.66 6057.46,3534.99 ; 6057.46,3584.99 6065.79,3584.99 6065.79,3576.66 6082.46,3576.66 6082.46,3584.99 6090.79,3584.99 6090.79,3601.66 6082.46,3601.66 6082.46,3609.99 6065.79,3609.99 6065.79,3601.66 6057.46,3601.66 6057.46,3584.99 ; 6057.46,3659.99 6065.79,3659.99 6074.12,3651.66 6082.46,3659.99 6090.79,3659.99 6082.46,3668.33 6090.79,3676.66 6082.46,3676.66 6074.12,3684.99 6065.79,3676.66 6057.46,3676.66 6065.79,3668.33 6057.46,3659.99 ; 6057.46,3734.99 6065.79,3734.99 6074.12,3726.66 6082.46,3734.99 6090.79,3734.99 6082.46,3743.33 6090.79,3751.66 6082.46,3751.66 6074.12,3759.99 6065.79,3751.66 6057.46,3751.66 6065.79,3743.33 6057.46,3734.99 ; 6057.46,3876.66 6074.12,3884.99 6090.79,3876.66 6082.46,3893.33 6090.79,3909.99 6074.12,3901.66 6057.46,3909.99 6065.79,3893.33 6057.46,3876.66 ; 6057.46,3951.66 6090.79,3951.66 6090.79,3984.99 6057.46,3984.99 6057.46,3951.66 ; 6057.46,4034.99 6065.79,4034.99 6065.79,4026.66 6082.46,4026.66 6082.46,4034.99 6090.79,4034.99 6090.79,4051.66 6082.46,4051.66 6082.46,4059.99 6065.79,4059.99 6065.79,4051.66 6057.46,4051.66 6057.46,4034.99 ; 6064.12,3283.33 6084.12,3283.33 6084.12,3303.33 6064.12,3303.33 6064.12,3283.33 ; 6064.12,3528.33 6084.12,3528.33 6074.12,3508.33 6064.12,3528.33 ; 6064.12,3588.33 6069.12,3588.33 6069.12,3583.33 6079.12,3583.33 6079.12,3588.33 6084.12,3588.33 6084.12,3598.33 6079.12,3598.33 6079.12,3603.33 6069.12,3603.33 6069.12,3598.33 6064.12,3598.33 6064.12,3588.33 ; 6064.12,3663.33 6069.12,3663.33 6074.12,3658.33 6079.12,3663.33 6084.12,3663.33 6079.12,3668.33 6084.12,3673.33 6079.12,3673.33 6074.12,3678.33 6069.12,3673.33 6064.12,3673.33 6069.12,3668.33 6064.12,3663.33 ; 6064.12,3883.33 6074.12,3888.33 6084.12,3883.33 6079.12,3893.33 6084.12,3903.33 6074.12,3898.33 6064.12,3903.33 6069.12,3893.33 6064.12,3883.33
  lines w12: 6026,3104.16 9911.95,3104.16 ; 6026,4079.16 9911.95,4079.16 ; 6317.44,3029.16 6317.44,4154.16 ; 6652.35,3029.16 6652.35,4154.16 ; 7341.16,3029.16 7341.16,4154.16 ; 7610.09,3029.16 7610.09,4154.16 ; 7993,3029.16 7993,4154.16 ; 8752.77,3029.16 8752.77,4154.16 ; 9309.62,3029.16 9309.62,4154.16 ; 6026,3029.16 9911.95,3029.16 9911.95,4154.16 6026,4154.16 6026,3029.16
  text "Symbol" at 6071,4101.66 h36
  text "Quantity" at 6339.94,4101.66 h36
  text "Finished Hole Size" at 6674.85,4101.66 h36
  text "Plated" at 7363.66,4101.66 h36
  text "Hole Type" at 7632.59,4101.66 h36
  text "Drill Layer Pair" at 8015.5,4101.66 h36
  text "Hole Tolerance" at 8775.27,4101.66 h36
  text "Hole Length" at 9332.12,4101.66 h36
  text "6" at 6339.94,4026.66 h30
  text "35.43mil (0.900mm)" at 6674.85,4026.66 h30
  text "NPTH" at 7363.66,4026.66 h30
  text "Round" at 7632.59,4026.66 h30
  text "Top Layer - Bottom Layer" at 8015.5,4026.66 h30
  text "-" at 9332.12,4026.66 h30
  text "2" at 6339.94,3951.66 h30
  text "118.11mil (3.000mm)" at 6674.85,3951.66 h30
  text "NPTH" at 7363.66,3951.66 h30
  text "Round" at 7632.59,3951.66 h30
  text "Top Layer - Bottom Layer" at 8015.5,3951.66 h30
  text "+/-0.00mil" at 8775.27,3951.66 h30
  text "-" at 9332.12,3951.66 h30
  text "4" at 6339.94,3876.66 h30
  text "125.00mil (3.175mm)" at 6674.85,3876.66 h30
  text "NPTH" at 7363.66,3876.66 h30
  text "Round" at 7632.59,3876.66 h30
  text "Top Layer - Bottom Layer" at 8015.5,3876.66 h30
  text "-" at 9332.12,3876.66 h30
  text "17" at 6339.94,3801.66 h30
  text "7.87mil (0.200mm)" at 6674.85,3801.66 h30
  text "PTH" at 7363.66,3801.66 h30
  text "Round" at 7632.59,3801.66 h30
  text "Top Layer - Bottom Layer" at 8015.5,3801.66 h30
  text "-" at 9332.12,3801.66 h30
  text "1" at 6339.94,3726.66 h30
  text "12.00mil (0.305mm)" at 6674.85,3726.66 h30
  text "PTH" at 7363.66,3726.66 h30
  text "Round" at 7632.59,3726.66 h30
  text "Top Layer - Bottom Layer" at 8015.5,3726.66 h30
  text "-" at 9332.12,3726.66 h30
  text "166" at 6339.94,3651.66 h30
  text "12.00mil (0.305mm)" at 6674.85,3651.66 h30
  text "PTH" at 7363.66,3651.66 h30
  text "Round" at 7632.59,3651.66 h30
  text "Top Layer - Bottom Layer" at 8015.5,3651.66 h30
  text "-" at 9332.12,3651.66 h30
  text "1" at 6339.94,3576.66 h30
  text "18.00mil (0.457mm)" at 6674.85,3576.66 h30
  text "PTH" at 7363.66,3576.66 h30
  text "Round" at 7632.59,3576.66 h30
  text "Top Layer - Bottom Layer" at 8015.5,3576.66 h30
  text "-" at 9332.12,3576.66 h30
  text "7" at 6339.94,3501.66 h30
  text "20.00mil (0.508mm)" at 6674.85,3501.66 h30
  text "PTH" at 7363.66,3501.66 h30
  text "Round" at 7632.59,3501.66 h30
  text "Top Layer - Bottom Layer" at 8015.5,3501.66 h30
  text "-" at 9332.12,3501.66 h30
  text "52" at 6339.94,3426.66 h30
  text "40.00mil (1.016mm)" at 6674.85,3426.66 h30
  text "PTH" at 7363.66,3426.66 h30
  text "Round" at 7632.59,3426.66 h30
  text "Top Layer - Bottom Layer" at 8015.5,3426.66 h30
  text "-" at 9332.12,3426.66 h30
  text "58" at 6339.94,3351.66 h30
  text "40.16mil (1.020mm)" at 6674.85,3351.66 h30
  text "PTH" at 7363.66,3351.66 h30
  text "Round" at 7632.59,3351.66 h30
  text "Top Layer - Bottom Layer" at 8015.5,3351.66 h30
  text "-" at 9332.12,3351.66 h30
  text "1" at 6339.94,3276.66 h30
  text "21.00mil (0.533mm)" at 6674.85,3276.66 h30
  text "NPTH" at 7363.66,3276.66 h30
  text "Slot" at 7632.59,3276.66 h30
  text "Top Layer - Bottom Layer" at 8015.5,3276.66 h30
  text "87.00mil (2.210mm)" at 9332.12,3276.66 h30
  text "2" at 6339.94,3201.66 h30
  text "21.00mil (0.533mm)" at 6674.85,3201.66 h30
  text "NPTH" at 7363.66,3201.66 h30
  text "Slot" at 7632.59,3201.66 h30
  text "Top Layer - Bottom Layer" at 8015.5,3201.66 h30
  text "150.00mil (3.810mm)" at 9332.12,3201.66 h30
  text "2" at 6339.94,3126.66 h30
  text "23.62mil (0.600mm)" at 6674.85,3126.66 h30
  text "PTH" at 7363.66,3126.66 h30
  text "Slot" at 7632.59,3126.66 h30
  text "Top Layer - Bottom Layer" at 8015.5,3126.66 h30
  text "51.18mil (1.300mm)" at 9332.12,3126.66 h30
  text "319 Total" at 6339.94,3051.66 h30
  text "Slot definitions :" at 6071,2969.17 h30
  text "Routed Path Length" at 6601.34,2969.17 h30
  text "= Calculated from tool start centre position to tool end centre position." at 7166.68,2969.17 h30
  text "Hole Length" at 6601.34,2909.19 h30
  text "= Routed Path Length + Tool Size = Slot length as defined in the PCB layout" at 6961.74,2909.19 h30
  text ".Layer_Name" at 527,-1823.49 h30
M17 Embedded Cavity:
  text ".Layer_Name" at 527,-1823.49 h30
M18 Embedded Assembly:
  text ".Layer_Name" at 527,-1823.49 h30
M19 Embedded Keepout:
  text ".Layer_Name" at 527,-1823.49 h30

## Dimensions
-19,3896 to -23,0.03 on M2 Board Dimensions
0.88,-45 to 2301,-38 on M2 Board Dimensions
-50,-1365 to 950,-1365 on M2 Board Dimensions

## Text inside footprints (layer, text, board x,y; h text height)
J1/J3: Top Overlay "21" at 329,1812.53 h30; Top Overlay "30" at 324,742.53 h30; Top Overlay "1" at 244,1812.53 h30; Top Overlay "10" at 227,742.53 h30; Top Overlay "J3" at 397.43,1812.53 h30; Top Overlay "J1" at 130.02,1812.53 h30
J2/J4: Top Overlay "40" at 1923.88,1814.35 h30; Top Overlay "31" at 1928.88,744.35 h30; Top Overlay "11" at 2031.88,744.35 h30; Top Overlay "20" at 2023.88,1814.35 h30; Top Overlay "J2" at 2097.3,1814.35 h30; Top Overlay "J4" at 1829.9,1814.35 h30
Logo6: Bottom Overlay "For evaluation only; not FCC approved for resale." at 1861.29,171 h30